# Altium PCB LPCB279R0.PcbDoc (part 1 of 3)
Units mm, origin at the board's own origin, x right, y up, seen from the top; angles counter-clockwise.
Board outline 96 x 109 mm, 2 copper layers (Top Layer, Bottom Layer); 115 components, 90 nets, 384 pads, 812 vias.
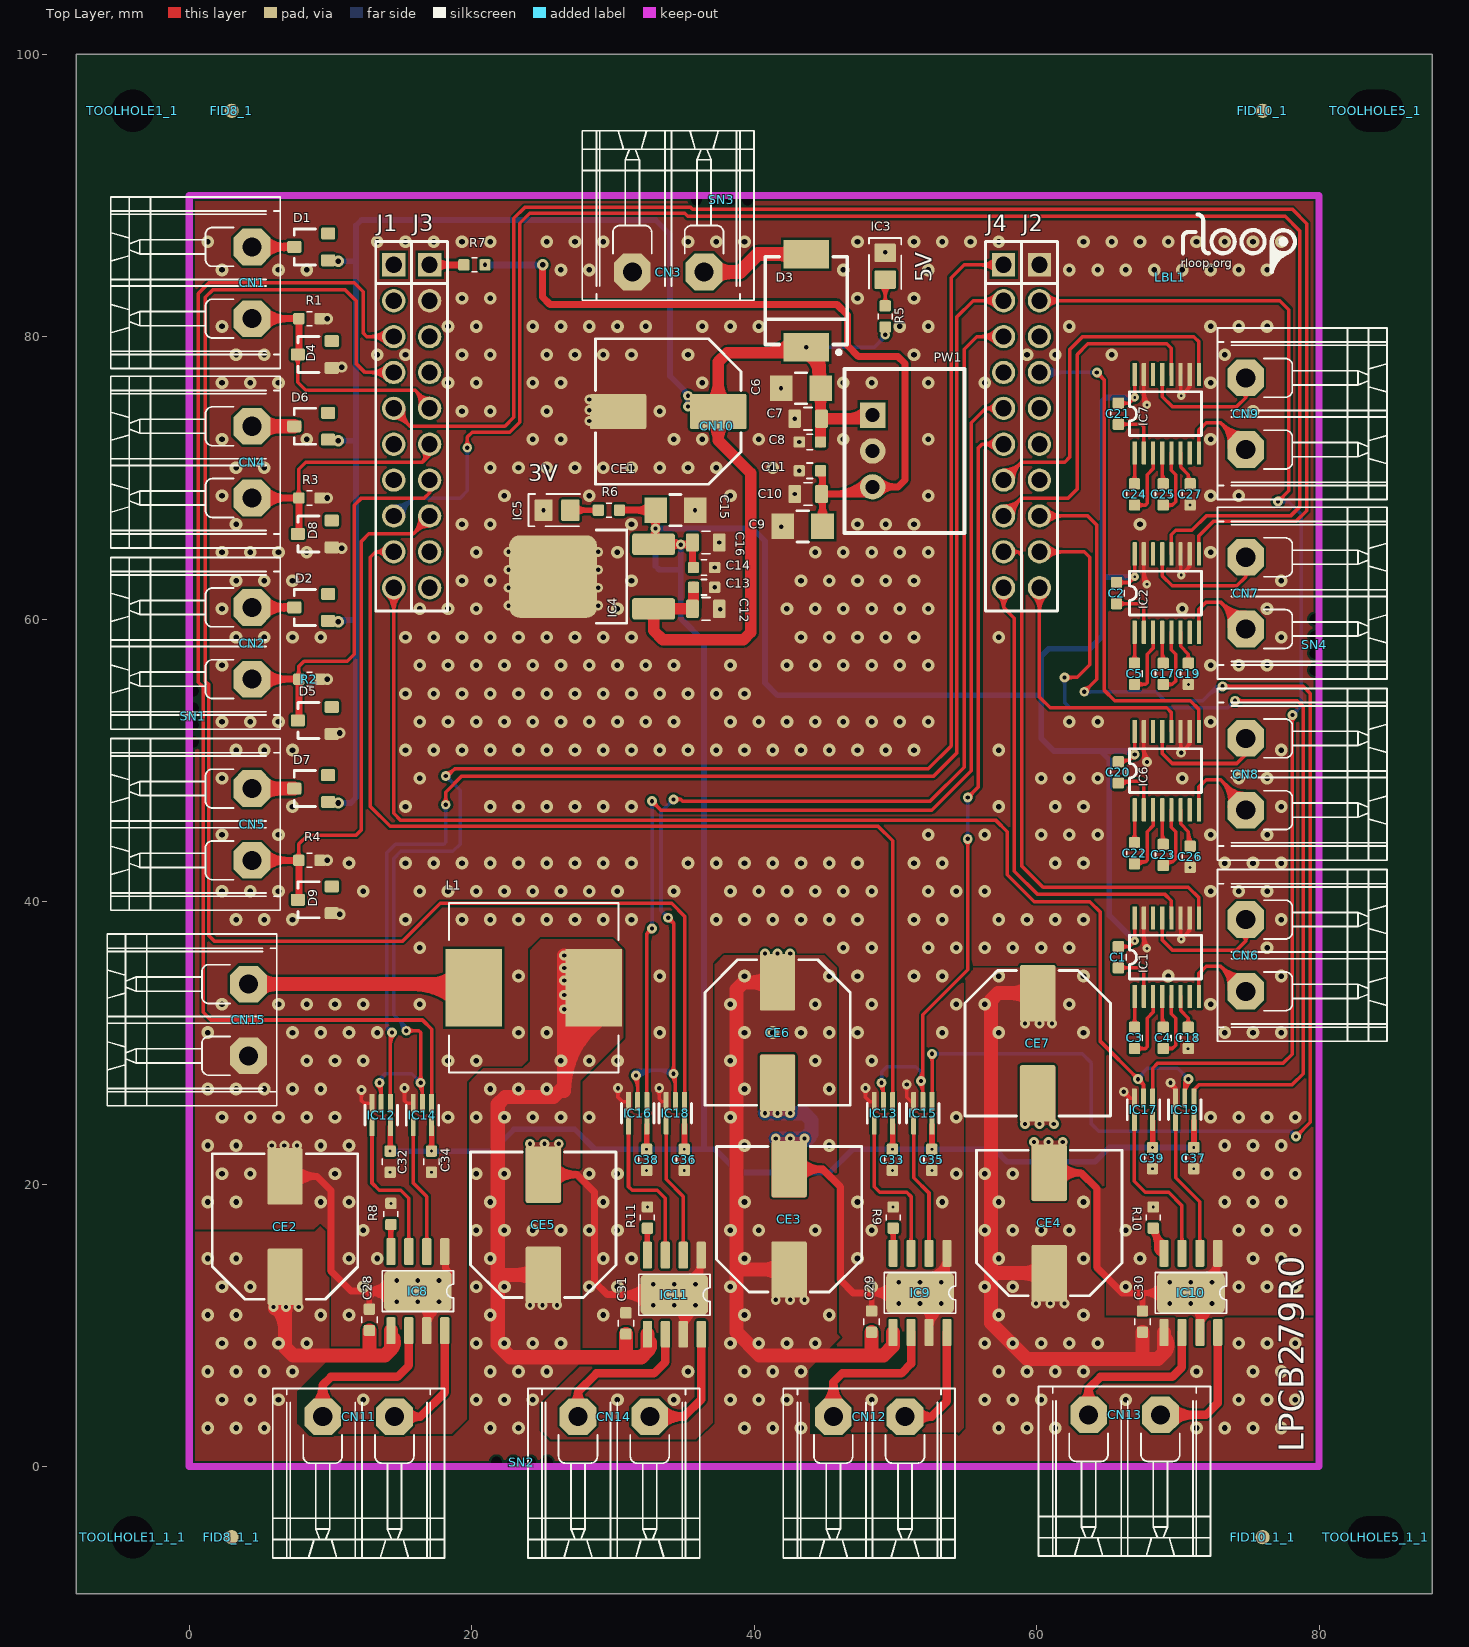
[diagram p0: Top Layer view]
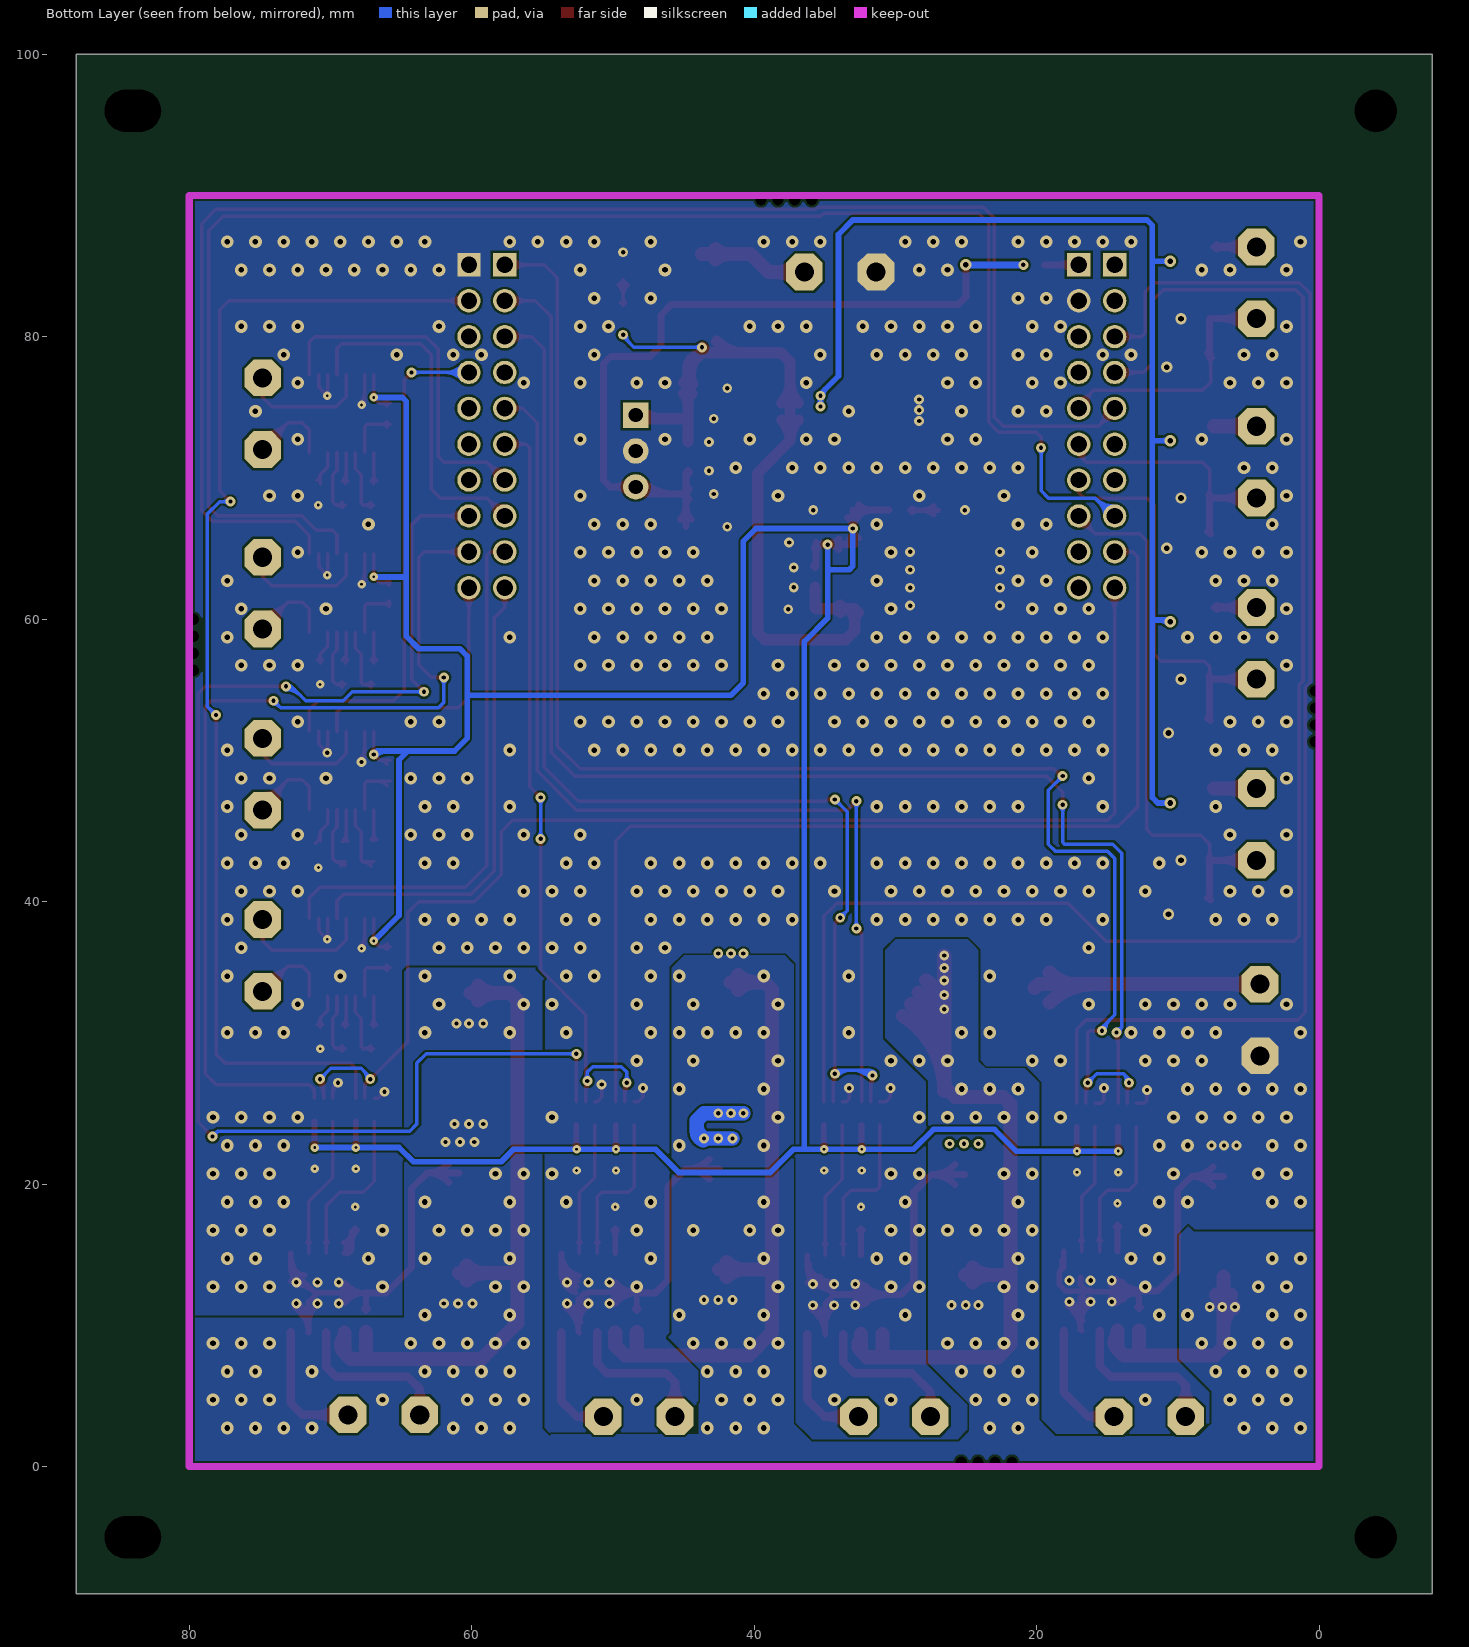
[diagram p1: Bottom Layer view, seen from below]

## Layer stack, top to bottom
Top Layer: signal copper 0.0356
Dielectric: dielectric 0.32, FR-4, Dk 4.8
Bottom Layer: signal copper 0.0356

## Board outline
-8,-9 -8,100 88,100 88,-9

## Design rules (kind name [scope] priority, off if disabled: settings)
Clearance [All] p1: gap=0.16
Height [All] p1 off: minheight=0 maxheight=25.4 prefheight=12.7
HoleSize [All] p1: absolutevalues=TRUE maxlimit=6 minlimit=0.025 maxpercent=80.000 minpercent=20.000
MinimumSolderMaskSliver [All] p1 off: minsoldermaskwidth=0.1
PlaneConnect PlaneConnect_1 [IsVia] p1: planeconnectstyle=Direct reliefexpansion=0.508 reliefentries=4 reliefconductorwidth=0.254 reliefairgap=0.254
PlaneConnect [All] p2: planeconnectstyle=Relief reliefexpansion=0.508 reliefentries=4 reliefconductorwidth=0.254 reliefairgap=0.254
PolygonConnect [IsVia] p1: connectstyle=Direct reliefconductorwidth=0.254 reliefentries=4 polygonreliefangle="90 Angle" airgapwidth=0.254
PolygonConnect PolygonConnect_1 [All] p2: connectstyle=Direct reliefconductorwidth=0.254 reliefentries=4 polygonreliefangle="90 Angle" airgapwidth=0.254
RoomDefinition "LPCB279 - TOP" [InComponentClass('LPCB279 - TOP')] p1: confinementstyle=ConfineIn formatcopy=TRUE lockcomponents=FALSE outline -154.685,-91.268 -103.885,-91.268 -103.885,-65.868 -154.685,-65.868
RoomDefinition "U_LPCB279 - POWER" [InComponentClass('U_LPCB279 - POWER')] p2: confinementstyle=ConfineIn formatcopy=TRUE lockcomponents=FALSE outline 169.038,80.563 204.979,80.563 204.979,130.855 169.038,130.855
RoomDefinition "U_LPCB279 - LIMIT SWITCHES" [InComponentClass('U_LPCB279 - LIMIT SWITCHES')] p3: confinementstyle=ConfineIn formatcopy=TRUE lockcomponents=FALSE outline 169.165,61.386 336.932,61.386 336.932,80.69 169.165,80.69
RoutingVias [All] p1: holewidth=0.6 width=1.2 viastyle="Through Hole" minholewidth=0.3 minwidth=0.6 maxholewidth=1 maxwidth=2
SilkToSilkClearance [All] p1 off: silktosilkclearance=0.1
SilkToSolderMaskClearance [IsPad] p1 off: minsilkscreentomaskgap=0.1 clearancetoexposedcopper=TRUE
SolderMaskExpansion [All] p1: expansion=0.102
Width [All] p1: maxlimit=1 minlimit=0.16 preferedwidth=0.2
22 further rules are at their usual default settings.

## Classes and differential pairs
component class "LPCB279 - TOP": LBL1 SN1 SN2 SN3 SN4
component class "U_LPCB279 - ANALOG INPUTS": CN1 CN2 CN4 CN5 D1 D2 D4 D5 D6 D7 D8 D9 R1 R2 R3 R4
component class "U_LPCB279 - POWER": C6 C7 C8 C9 C10 C11 C12 C13 C14 C15 C16 CE1 CN3 D3 IC3 IC4 IC5 PW1 R5 R6
component class "U_LPCB279 - HBRIDGE": C28 C29 C30 C31 CE2 CE3 CE4 CE5 CE6 CE7 CN11 CN12 CN13 CN14 CN15 IC8 IC9 IC10 IC11 L1 R8 R9 R10 R11
component class "U_LPCB279 - AND GATES": C32 C33 C34 C35 C36 C37 C38 C39 IC12 IC13 IC14 IC15 IC16 IC17 IC18 IC19
component class "U_LPCB279 - LIMIT SWITCHES": C1 C2 C3 C4 C5 C17 C18 C19 C20 C21 C22 C23 C24 C25 C26 C27 CN6 CN7 CN8 CN9 IC1 IC2 IC6 IC7
component class "U_LPCB279 - RM57 LAUNCH": CN10 R7

## Components (designator, comment, footprint, x,y, rotation, side; value= is the part's Value field where it differs from the comment)
C1 "100nF / 50V / 10% / SMD 0603" LFP011__CC1608-0603-IPC7351_B 65.786,36.068 r270 top
C2 "100nF / 50V / 10% / SMD 0603" LFP011__CC1608-0603-IPC7351_B 65.659,61.849 r270 top
C3 "100nF / 50V / 10% / SMD 0603" LFP011__CC1608-0603-IPC7351_B 66.929,30.353 r270 top
C4 "100nF / 50V / 10% / SMD 0603" LFP011__CC1608-0603-IPC7351_B 68.961,30.353 r270 top
C5 "100nF / 50V / 10% / SMD 0603" LFP011__CC1608-0603-IPC7351_B 66.929,56.134 r270 top
C6 "10uF / 50V / 10% / SMD 1206" LFP043__CC3216-1206 43.307,76.355 r180 top
C7 "1uF / 50V / 10% / SMD 0805" LFP010__CC2012-0805-IPC7351_B 43.815,74.196 r180 top
C8 "100nF / 50V / 10% / SMD 0603" LFP011__CC1608-0603-IPC7351_B 43.942,72.545 r180 top
C9 "10uF / 50V / 10% / SMD 1206" LFP043__CC3216-1206 43.434,66.576 r180 top
C10 "1uF / 50V / 10% / SMD 0805" LFP010__CC2012-0805-IPC7351_B 43.815,68.862 r180 top
C11 "100nF / 50V / 10% / SMD 0603" LFP011__CC1608-0603-IPC7351_B 43.942,70.513 r180 top
C12 "1uF / 50V / 10% / SMD 0805" LFP010__CC2012-0805-IPC7351_B 36.576,60.734 r0 top
C13 "100nF / 50V / 10% / SMD 0603" LFP011__CC1608-0603-IPC7351_B 36.449,62.258 r0 top
C14 "100nF / 50V / 10% / SMD 0603" LFP011__CC1608-0603-IPC7351_B 36.449,63.655 r0 top
C15 "10uF / 50V / 10% / SMD 1206" LFP043__CC3216-1206 34.417,67.719 r0 top
C16 "1uF / 50V / 10% / SMD 0805" LFP010__CC2012-0805-IPC7351_B 36.576,65.433 r0 top
C17 "100nF / 50V / 10% / SMD 0603" LFP011__CC1608-0603-IPC7351_B 68.961,56.134 r270 top
C18 "100nF / 50V / 10% / SMD 0603" LFP011__CC1608-0603-IPC7351_B 70.739,30.353 r270 top
C19 "100nF / 50V / 10% / SMD 0603" LFP011__CC1608-0603-IPC7351_B 70.739,56.134 r270 top
C20 "100nF / 50V / 10% / SMD 0603" LFP011__CC1608-0603-IPC7351_B 65.786,49.149 r270 top
C21 "100nF / 50V / 10% / SMD 0603" LFP011__CC1608-0603-IPC7351_B 65.786,74.549 r270 top
C22 "100nF / 50V / 10% / SMD 0603" LFP011__CC1608-0603-IPC7351_B 66.929,43.434 r270 top
C23 "100nF / 50V / 10% / SMD 0603" LFP011__CC1608-0603-IPC7351_B 68.961,43.307 r270 top
C24 "100nF / 50V / 10% / SMD 0603" LFP011__CC1608-0603-IPC7351_B 66.929,68.834 r270 top
C25 "100nF / 50V / 10% / SMD 0603" LFP011__CC1608-0603-IPC7351_B 68.961,68.834 r270 top
C26 "100nF / 50V / 10% / SMD 0603" LFP011__CC1608-0603-IPC7351_B 70.866,43.18 r270 top
C27 "100nF / 50V / 10% / SMD 0603" LFP011__CC1608-0603-IPC7351_B 70.866,68.834 r270 top
C28 "100nF / 50V / 10% / SMD 0603" LFP011__CC1608-0603-IPC7351_B 12.753,10.395 r90 top
C29 "100nF / 50V / 10% / SMD 0603" LFP011__CC1608-0603-IPC7351_B 48.313,10.268 r90 top
C30 "100nF / 50V / 10% / SMD 0603" LFP011__CC1608-0603-IPC7351_B 67.49,10.268 r90 top
C31 "100nF / 50V / 10% / SMD 0603" LFP011__CC1608-0603-IPC7351_B 30.914,10.141 r90 top
C32 "100nF / 50V / 10% / SMD 0603" LFP011__CC1608-0603-IPC7351_B 14.224,21.59 r270 top
C33 "100nF / 50V / 10% / SMD 0603" LFP011__CC1608-0603-IPC7351_B 49.784,21.717 r270 top
C34 "100nF / 50V / 10% / SMD 0603" LFP011__CC1608-0603-IPC7351_B 17.145,21.59 r270 top
C35 "100nF / 50V / 10% / SMD 0603" LFP011__CC1608-0603-IPC7351_B 52.578,21.717 r270 top
C36 "100nF / 50V / 10% / SMD 0603" LFP011__CC1608-0603-IPC7351_B 35.052,21.717 r270 top
C37 "100nF / 50V / 10% / SMD 0603" LFP011__CC1608-0603-IPC7351_B 71.12,21.844 r270 top
C38 "100nF / 50V / 10% / SMD 0603" LFP011__CC1608-0603-IPC7351_B 32.385,21.717 r270 top
C39 "100nF / 50V / 10% / SMD 0603" LFP011__CC1608-0603-IPC7351_B 68.199,21.844 r270 top
CE1 "330uF / 35V / 20% / SMD 10x10" LFP041__NICHICON_WT_10X10 33.909,74.704 r180 top
CE2 "330uF / 35V / 20% / SMD 10x10" LFP041__NICHICON_WT_10X10 6.784,16.999 r90 top
CE3 "330uF / 35V / 20% / SMD 10x10" LFP041__NICHICON_WT_10X10 42.471,17.507 r90 top
CE4 "330uF / 35V / 20% / SMD 10x10" LFP041__NICHICON_WT_10X10 60.886,17.253 r90 top
CE5 "330uF / 35V / 20% / SMD 10x10" LFP041__NICHICON_WT_10X10 25.072,17.126 r90 top
CE6 "330uF / 35V / 20% / SMD 10x10" LFP041__NICHICON_WT_10X10 41.656,30.734 r270 top
CE7 "330uF / 35V / 20% / SMD 10x10" LFP041__NICHICON_WT_10X10 60.071,29.972 r270 top
CN1 "691 313 510 002" "691 313 510 002" 4.445,86.36 r270 top
CN2 "691 313 510 002" "691 313 510 002" 4.445,60.833 r270 top
CN3 "691 313 510 002" "691 313 510 002" 36.449,84.582 r180 top
CN4 "691 313 510 002" "691 313 510 002" 4.445,73.66 r270 top
CN5 "691 313 510 002" "691 313 510 002" 4.445,48.006 r270 top
CN6 "691 313 510 002" "691 313 510 002" 74.803,33.655 r90 top locked
CN7 "691 313 510 002" "691 313 510 002" 74.803,59.309 r90 top locked
CN8 "691 313 510 002" "691 313 510 002" 74.803,46.482 r90 top locked
CN9 "691 313 510 002" "691 313 510 002" 74.803,72.009 r90 top locked
CN10 "RM57LAUNCHXL_BP_40P_1" RM57LAUNCHXL_BP_40P_1 14.478,85.09 r0 top locked
CN11 "691 313 510 002" "691 313 510 002" 9.451,3.537 r0 top
CN12 "691 313 510 002" "691 313 510 002" 45.604,3.537 r0 top
CN13 "691 313 510 002" "691 313 510 002" 63.68,3.664 r0 top
CN14 "691 313 510 002" "691 313 510 002" 27.527,3.537 r0 top
CN15 "691 313 510 002" "691 313 510 002" 4.191,34.163 r270 top locked
D1 "BAS16" LFP021__SOT23 8.636,86.36 r90 top
D2 "BAS16" LFP021__SOT23 8.636,60.833 r90 top
D3 "S3M-E3/57T" LFP040__DO-214AB 43.688,82.55 r90 top
D4 "MMBZ5226BLT1G" LFP021__SOT23 8.89,78.74 r90 top
D5 "MMBZ5226BLT1G" LFP021__SOT23 8.89,52.832 r90 top
D6 "BAS16" LFP021__SOT23 8.636,73.66 r90 top
D7 "BAS16" LFP021__SOT23 8.636,48.006 r90 top
D8 "MMBZ5226BLT1G" LFP021__SOT23 8.89,66.04 r90 top
D9 "MMBZ5226BLT1G" LFP021__SOT23 8.89,40.132 r90 top
FID8_1 "FIDUCIAL" LFP113__FIDUCIAL 3,96 r0 top
FID8_1_1 "FIDUCIAL" LFP113__FIDUCIAL 3,-5 r0 top
FID10_1 "FIDUCIAL" LFP113__FIDUCIAL 76,96 r0 top
FID10_1_1 "FIDUCIAL" LFP113__FIDUCIAL 76,-5 r0 top
IC1 "MAX3232CPWR" LFP049__TSSOP-16 69.215,36.068 r0 top
IC2 "MAX3232CPWR" LFP049__TSSOP-16 69.215,61.849 r0 top
IC3 "EL-17-21VGC/TR8" CR2012-0805-LED 49.276,84.991 r270 top
IC4 "NCV4274DT33RKG" LFP019__369A-13 28.321,63.02 r90 top
IC5 "EL-17-21VGC/TR8" CR2012-0805-LED 26.035,67.719 r0 top
IC6 "MAX3232CPWR" LFP049__TSSOP-16 69.215,49.276 r0 top
IC7 "MAX3232CPWR" LFP049__TSSOP-16 69.215,74.549 r0 top locked
IC8 "DRV8871DDARQ1" LFP158__DDA_R-PDSO-G8 16.182,12.427 r180 top
IC9 "DRV8871DDARQ1" LFP158__DDA_R-PDSO-G8 51.742,12.3 r180 top
IC10 "DRV8871DDARQ1" LFP158__DDA_R-PDSO-G8 70.919,12.3 r180 top
IC11 "DRV8871DDARQ1" LFP158__DDA_R-PDSO-G8 34.343,12.173 r180 top
IC12 "74LVC1G08GW,125" LFP047__SOT353 13.589,24.892 r180 top
IC13 "74LVC1G08GW,125" LFP047__SOT353 49.149,25.019 r180 top
IC14 "74LVC1G08GW,125" LFP047__SOT353 16.51,24.892 r180 top
IC15 "74LVC1G08GW,125" LFP047__SOT353 51.943,25.019 r180 top
IC16 "74LVC1G08GW,125" LFP047__SOT353 31.75,25.019 r180 top
IC17 "74LVC1G08GW,125" LFP047__SOT353 67.564,25.273 r180 top
IC18 "74LVC1G08GW,125" LFP047__SOT353 34.417,25.019 r180 top
IC19 "74LVC1G08GW,125" LFP047__SOT353 70.485,25.273 r180 top
L1 "MSS1278T-103MLB" LFP037__MSS1278T 24.384,33.909 r0 top
LBL1 "RLOOP_LOGO" RLOOP_LOGO 69.469,84.201 r0 top
PW1 "173010542" 173010542 48.387,71.91 r270 top
R1 "160R / 0.1W / 1% / SMD 0603" LFP020__CR1608-0603-IPC7351_B 8.509,81.28 r180 top
R2 "160R / 0.1W / 1% / SMD 0603" LFP020__CR1608-0603-IPC7351_B 8.509,55.753 r180 top
R3 "160R / 0.1W / 1% / SMD 0603" LFP020__CR1608-0603-IPC7351_B 8.509,68.58 r180 top
R4 "160R / 0.1W / 1% / SMD 0603" LFP020__CR1608-0603-IPC7351_B 8.509,42.926 r180 top
R5 "2.2K / 0.1W / 1% / SMD 0603" LFP020__CR1608-0603-IPC7351_B 49.276,81.435 r270 top
R6 "2.2K / 0.1W / 1% / SMD 0603" LFP020__CR1608-0603-IPC7351_B 29.718,67.719 r0 top
R7 "0R / 0.1W / SMD 0603" LFP020__CR1608-0603-IPC7351_B 20.193,85.09 r0 top
R8 "30K / 0.1W / 1% / SMD 0603" LFP020__CR1608-0603-IPC7351_B 14.277,17.888 r270 top
R9 "30K / 0.1W / 1% / SMD 0603" LFP020__CR1608-0603-IPC7351_B 49.837,17.634 r270 top
R10 "30K / 0.1W / 1% / SMD 0603" LFP020__CR1608-0603-IPC7351_B 68.252,17.634 r270 top
R11 "30K / 0.1W / 1% / SMD 0603" LFP020__CR1608-0603-IPC7351_B 32.438,17.634 r270 top
SN1 "PCB_SNAPOUT_0.3MM" PCB_SNAPOUT_0.3MM 0,53.114 r270 top
SN2 "PCB_SNAPOUT_0.3MM" PCB_SNAPOUT_0.3MM 23.548,0 r0 top
SN3 "PCB_SNAPOUT_0.3MM" PCB_SNAPOUT_0.3MM 37.719,90 r180 top
SN4 "PCB_SNAPOUT_0.3MM" PCB_SNAPOUT_0.3MM 80,58.194 r90 top
TOOLHOLE1_1 "Comment" TOOL-1#1 -4,96 r0 top
TOOLHOLE1_1_1 "Comment" TOOL-1#1 -4,-5 r0 top
TOOLHOLE5_1 "Comment" TOOL-1#2 84,96 r0 top
TOOLHOLE5_1_1 "Comment" TOOL-1#2 84,-5 r0 top

## Footprints (in the part's own frame and the unit in brackets; to place one, negate y for a bottom-side part, rotate by r counter-clockwise, add the part's x,y. Pads: shape width x height; smd on the part's side, far side on the other; paste and mask are expansions set on the pad)
"691 313 510 002" [mm] "Connector, Pluggable Terminal Block, 5.08mm, 2 Way, PTH"
  oct 2.6x2.6 hole 1.35: 1(0,0) 2(5.08,0)
  silkscreen extent -3.54,-10 8.62,2
173010542 [mm]
  rect 1.8x1.8 hole 1 paste-0.01: 1(-2.54,0)
  round 1.8 hole 1 paste-0.01: 2(0,0) 3(2.54,0)
  silkscreen extent -5.8,-2 5.8,6.5
CR2012-0805-LED [mm]
  rrect10% 1.3x1.5 smd paste-0.05: A(0.95,0) K(-0.95,0)
  silkscreen extent -2.01,-1.14 1.63,1.14
LFP010__CC2012-0805-IPC7351_B [mm]
  rrect25% 0.9x1.3 smd paste-0.01: 1(-0.95,0) 2(0.95,0)
  silkscreen extent -0.3,-0.8 0.3,0.8
LFP011__CC1608-0603-IPC7351_B [mm]
  rrect25% 0.8x0.8 smd: 1(-0.75,0) 2(0.75,0)
  silkscreen extent -0.2,-0.55 0.2,0.55
LFP019__369A-13 [mil]
  rrect25% 60x120 smd: 1(-90,-179.49) 3(90,-179.49)
  rrect25% 230x245 smd paste-196.85: 4(0,100.75)
  silkscreen extent -130,-104 130,-19
LFP020__CR1608-0603-IPC7351_B [mm]
  rrect25% 0.8x0.8 smd: 1(-0.75,0) 2(0.75,0)
  silkscreen extent -0.2,-0.5 0.2,0.5
LFP021__SOT23 [mm] "SOT-23; 3 Leads; Body 3.0 x 2.5 mm, inc. leads (LxW max)"
  rrect25% 0.85x1 smd paste-0.05: 1(-0.95,-1.2) 2(0.95,-1.2) 3(0,1.2)
  silkscreen extent -1.27,-0.3 1.28,1.2
LFP037__MSS1278T [mm]
  rect 4x5.5 smd: 1(-4.25,0) 2(4.25,0)
  silkscreen extent -6,-6 6,6
LFP040__DO-214AB [mm]
  rect 2.032x3.2 smd: 1(-3.3,0) 2(3.3,0)
  silkscreen extent -3.8,-2.9 3.1,2.9
LFP041__NICHICON_WT_10X10 [mm]
  rrect10% 4x2.5 smd paste-0.02: 1(-3.55,0) 2(3.55,0)
  silkscreen extent -5.15,-5.15 5.15,5.15
LFP043__CC3216-1206 [mm]
  rect 1.6x1.8 smd paste-0.01: 1(-1.4,0) 2(1.4,0)
  silkscreen extent -0.4,-1.1 0.4,1.1
LFP047__SOT353 [mm] "SOT-353/SC-88A; 5 Leads; Body 2.2 x 2.2 mm, inc. leads (LxW max)"
  rrect25% 0.35x1.35 smd paste-0.03: 1(-0.65,-0.825) 2(0,-0.825) 3(0.65,-0.825) 4(0.65,0.825) 5(-0.65,0.825)
  silkscreen extent -1.15,-0.7 1.15,0.7
LFP049__TSSOP-16 [mm] "Copied from 984E-02"
  rrect25% 0.3x1.65 smd paste-0.03: 1(-2.275,-2.775) 2(-1.625,-2.775) 3(-0.975,-2.775) 4(-0.325,-2.775) 5(0.325,-2.775) 6(0.975,-2.775) 7(1.625,-2.775) 8(2.275,-2.775) 9(2.275,2.775) 10(1.625,2.775) 11(0.975,2.775) 12(0.325,2.775) 13(-0.325,2.775) 14(-0.975,2.775) 15(-1.625,2.775) 16(-2.275,2.775)
  silkscreen extent -2.65,-1.55 2.45,1.55
LFP113__FIDUCIAL [mm]
  round 1 smd paste-2 mask+1.5: 0(0,0)
LFP158__DDA_R-PDSO-G8 [mm]
  rrect25% 0.65x1.9 smd paste-0.05: 1(-1.905,-2.8) 2(-0.635,-2.8) 3(0.635,-2.8) 4(1.905,-2.8) 5(1.905,2.8) 6(0.635,2.8) 7(-0.635,2.8) 8(-1.905,2.8)
  rrect25% 4.8x2.9 smd paste-5: PAD(0,0)
  silkscreen extent -2.52,-1.45 2.52,1.45
PCB_SNAPOUT_0.3MM [mm]
  round 0.4 hole 0.8 unplated: 0(-1.8,0.3) 0(-0.6,0.3) 0(0.6,0.3) 0(1.8,0.3)
RLOOP_LOGO [mm]
  silkscreen extent 0.89,0.39 8.82,4.45
RM57LAUNCHXL_BP_40P_1 [mm]
  rect 1.65x1.65 hole 1.15: J1_1(0,0) J2_1(45.72,0) J3_1(2.54,0) J4_1(43.18,0)
  round 1.65 hole 1.15: J1_2(0,-2.54) J1_3(0,-5.08) J1_4(0,-7.62) J1_5(0,-10.16) J1_6(0,-12.7) J1_7(0,-15.24) J1_8(0,-17.78) J1_9(0,-20.32) J1_10(0,-22.86) J2_2(45.72,-2.54) J2_3(45.72,-5.08) J2_4(45.72,-7.62) J2_5(45.72,-10.16) J2_6(45.72,-12.7) J2_7(45.72,-15.24) J2_8(45.72,-17.78) J2_9(45.72,-20.32) J2_10(45.72,-22.86) J3_2(2.54,-2.54) J3_3(2.54,-5.08) J3_4(2.54,-7.62) J3_5(2.54,-10.16) J3_6(2.54,-12.7) J3_7(2.54,-15.24) J3_8(2.54,-17.78) J3_9(2.54,-20.32) J3_10(2.54,-22.86) J4_2(43.18,-2.54) J4_3(43.18,-5.08) J4_4(43.18,-7.62) J4_5(43.18,-10.16) J4_6(43.18,-12.7) J4_7(43.18,-15.24) J4_8(43.18,-17.78) J4_9(43.18,-20.32) J4_10(43.18,-22.86)
  silkscreen extent -1.27,-24.51 46.99,1.65, body extent -1.27,-24.43 46.99,1.57, height 8.59
TOOL-1#1 [mm]
  round 2.54 hole 3 unplated: TOOL(0,0)
TOOL-1#2 [mm]
  round 0.076 hole 3 slot 4 at 0 deg unplated: TOOL1(0,0)

## Part data
C1 C2 C3 C4 C5 C8 C11 C13 C14 C17 C18 C19 C20 C21 C22 C23 C24 C25 C26 C27 C28 C29 C30 C31 C32 C33 C34 C35 C36 C37 C38 C39: "Capacitor, Ceramic Chip, 100nF (0.1uF), 50V, 5%, SMD 0603 [LCA016]"
C6 C9 C15: "Capacitor, Ceramic Chip, 10uF, 50V, X5R, 10%, SMD 1206 [LCA144]"
C7 C10 C12 C16: "Capacitor, Ceramic Chip, 1uF, 50V, SMD 0805 [LCA098]"
CE1 CE2 CE3 CE4 CE5 CE6 CE7: "Capacitor, Aluminum Electrolytic, 330uF, 35V, 20%, SMD (10mm x 10mm) [LCA071]"
CN1 CN2 CN3 CN4 CN5 CN6 CN7 CN8 CN9 CN11 CN12 CN13 CN14 CN15: "Connector, Pluggable Terminal Block, 5.08mm, 2 Way, PTH"
CN10: "Connector, RM57L843 LaunchXL, 40Pin Boosterpack Site1"
D1 D2 D6 D7: "Diode, Small Signal, 0.2A, 85V, SMD SOT-23 [LIC006]"
D3: "Diode, General Purpose Rectifier, 3A, 200V, SMD DO-214AB [LIC189]"
D4 D5 D8 D9: "Diode, Zener, 3.3V, 0.225W, SMD [LIC288]"
IC1 IC2 IC6 IC7: "IC, RS232 Line Driver, 3.3V, SMD TSSOP16 [LIC165]"
IC3 IC5: "LED, SMD, 0805 Green [LIC016]"
IC4: "IC, Voltage Regulator, 400mA, 3.3V LDO, SMD DPAK [LIC233]"
IC8 IC9 IC10 IC11: "IC, DC Motor Driver, 3.6A, SMD [LIC689]"
IC12 IC13 IC14 IC15 IC16 IC17 IC18 IC19: "IC, Logic AND Gate, Single 2 Input, SMD SOT353 [LIC239]"
L1: "Inductor, 10uH, 20%, 5.7A, SMD [LIN031]"
R1 R2 R3 R4: "Resistor, Ceramic Chip, 160R, 0.1W, 1%, SMD 0603 [LRE253]"
R5 R6: "Resistor, Ceramic Chip, 2.2K, 0.1W, 1%, SMD 0603 [LRE027]"
R7: "Resistor, Ceramic Chip, 0R, 0.1W, SMD 0603 [LRE026]"
R8 R9 R10 R11: "Resistor, Ceramic Chip, 30K, 0.1W, 1%, SMD 0603 [LRE120]"
SN1 SN2 SN3 SN4: "PCB Snapout + 0.3mm"

## Via types
v1: diameter 0.9, hole 0.4, Top Layer to Bottom Layer, tented both sides, 631 vias
v2: diameter 0.7, hole 0.3, Top Layer to Bottom Layer, tented both sides, 111 vias
v3: diameter 0.6, hole 0.2, Top Layer to Bottom Layer, tented both sides, 33 vias
v4: diameter 0.7, hole 0.33, Top Layer to Bottom Layer, tented bottom, 24 vias
v5: diameter 0.8, hole 0.4, Top Layer to Bottom Layer, tented both sides, 13 vias

## Nets (pads, with @x,y where several pads share a name; then routed paths per layer and width w, separated by ;. In a path a pad name is that pad's centre, name@x,y a point inside that pad or via, vN(x,y) a via of type N, cw(c..) or ccw(c..) an arc to the next point about the centre after c; other vN are vias at no path point)
BRIDGE_DIR_A1: CN10.J4_2 IC12.1 | length 105.6
  Top Layer w0.25: IC12.1@14.239,25.717 14.239,30.622 v2(14.351,30.734) ; 14.239,29.92 cw(c15.165,29.92) v2@14.51,30.575 ; v2@18.002,47.022 ccw(c17.618,47.406) 18.161,47.406 ccw(c18.704,47.406) v2@18.32,47.022 ; v2(18.161,46.863) 18.161,47.752 19.304,48.895 52.705,48.895 54.356,50.546 54.356,81.407 55.499,82.55 CN10.J4_2@57.658,82.55 ; CN10.J4_2@57.163,82.055 ccw(c55.968,80.86) 55.968,82.55 ccw(c55.968,84.24) CN10.J4_2@57.163,83.045 ; CN10.J4_2@57.34,82.232 ccw(c56.572,81.464) 56.572,82.55 ccw(c56.572,83.636) CN10.J4_2@57.34,82.868
  Bottom Layer w0.25: v2@14.126,30.735 ccw(c13.593,30.738) 13.97,31.115 ; v2@14.35,30.959 cw(c14.347,31.492) 13.97,31.115 ; v2(14.351,30.734) 13.97,31.115 ; v2@18.002,46.704 cw(c17.618,46.32) 18.161,46.32 cw(c18.704,46.32) v2@18.32,46.704 ; v2(18.161,46.863) 18.161,44.196 18.034,44.069 14.605,44.069 13.97,43.434 13.97,31.115
BRIDGE_DIR_A2: CN10.J4_5 IC16.1 | length 77.8
  Top Layer w0.25: IC16.1@32.4,25.844 32.4,37.734 ; v2@32.541,38.092 cw(c32.059,38.075) 32.4,37.734 ; v2@32.758,37.875 ccw(c32.741,37.393) 32.4,37.734 ; v2(32.766,38.1) 32.4,37.734 ; v2@32.766,46.892 cw(c32.766,46.349) 33.15,46.733 cw(c33.534,47.117) v2@32.991,47.117 ; v2(32.766,47.117) 33.401,46.482 52.578,46.482 55.372,49.276 55.372,73.914 56.388,74.93 ; CN10.J4_5@57.066,74.556 ccw(c56.388,74.128) 56.388,74.93 ; CN10.J4_5@57.066,75.304 cw(c56.388,75.732) 56.388,74.93 ; CN10.J4_5@57.658,74.93 56.388,74.93
  Bottom Layer w0.25: v2@32.607,38.259 ccw(c32.223,38.643) 32.766,38.643 ccw(c33.309,38.643) v2@32.925,38.259 ; v2@32.607,46.958 cw(c32.223,46.574) 32.766,46.574 cw(c33.309,46.574) v2@32.925,46.958 ; v2(32.766,38.1) v2(32.766,47.117)
BRIDGE_DIR_A3: CN10.J1_9 IC13.1 | length 77.5
  Top Layer w0.25: CN10.J1_9@13.886,64.396 ccw(c13.208,63.968) 13.208,64.77 ; CN10.J1_9@13.886,65.144 cw(c13.208,65.572) 13.208,64.77 ; CN10.J1_9@14.478,64.77 13.208,64.77 ; IC13.1@49.799,25.844 49.799,44.308 48.768,45.339 14.224,45.339 12.827,46.736 12.827,64.389 13.208,64.77
BRIDGE_DIR_A4: CN10.J2_2 IC17.1 | length 92.8
  Top Layer w0.25: CN10.J2_2@60.198,82.55 77.216,82.55 77.851,81.915 77.851,69.088 v2(77.089,68.326) ; CN10.J2_2@60.516,82.232 cw(c61.284,81.464) 61.284,82.55 cw(c61.284,83.636) CN10.J2_2@60.516,82.868 ; CN10.J2_2@60.693,82.055 cw(c61.888,80.86) 61.888,82.55 cw(c61.888,84.24) CN10.J2_2@60.693,83.045 ; IC17.1@68.214,26.098 68.214,28.209 68.58,28.575 77.47,28.575 78.105,29.21 ; v2@77.089,68.551 ccw(c77.089,69.094) 77.473,68.71 ccw(c77.857,68.326) v2@77.314,68.326 ; v2@77.946,53.054 cw(c77.562,52.67) 78.105,52.67 cw(c78.648,52.67) v2@78.264,53.054 ; 78.105,29.464 78.105,29.21 ; v2(78.105,53.213) 78.105,29.21
  Bottom Layer w0.25: v2(77.089,68.326) 77.851,68.326 78.74,67.437 78.74,53.848 v2(78.105,53.213) ; v2@77.248,68.167 cw(c77.632,67.783) 77.632,68.326 cw(c77.632,68.869) v2@77.248,68.485 ; v2@78.105,53.438 ccw(c78.105,53.981) 78.489,53.597 ccw(c78.873,53.213) v2@78.33,53.213
BRIDGE_DIR_B1: CN10.J1_3 IC14.1 | length 94.8
  Top Layer w0.25: CN10.J1_3@13.983,79.515 ccw(c12.788,78.32) 12.788,80.01 ccw(c12.788,81.7) CN10.J1_3@13.983,80.505 ; CN10.J1_3@14.16,79.692 ccw(c13.392,78.924) 13.392,80.01 ccw(c13.392,81.096) CN10.J1_3@14.16,80.328 ; CN10.J1_3@14.478,80.01 12.573,80.01 12.319,80.264 12.319,83.185 11.684,83.82 1.397,83.82 0.635,83.058 0.635,55.548 0.985,55.198 0.985,32.162 1.524,31.623 16.51,31.623 17.16,30.973 IC14.1@17.16,25.717
BRIDGE_DIR_B2: CN10.J1_4 IC18.1 | length 116.7
  Top Layer w0.25: CN10.J1_4@13.983,76.975 ccw(c12.788,75.78) 12.788,77.47 ccw(c12.788,79.16) CN10.J1_4@13.983,77.965 ; CN10.J1_4@14.16,77.152 ccw(c13.392,76.384) 13.392,77.47 ccw(c13.392,78.556) CN10.J1_4@14.16,77.788 ; CN10.J1_4@14.478,77.47 12.446,77.47 11.811,78.105 11.811,82.55 11.049,83.312 1.651,83.312 1.143,82.804 1.143,55.62 1.395,55.368 1.395,37.594 1.778,37.211 15.113,37.211 17.78,39.878 34.163,39.878 35.067,38.974 IC18.1@35.067,25.844
BRIDGE_DIR_B3: CN10.J2_8 IC15.1 | length 111.9
  Top Layer w0.25: v2@52.434,29.066 cw(c52.05,28.682) 52.593,28.682 cw(c53.136,28.682) v2@52.752,29.066 ; IC15.1@52.593,25.844 v2(52.593,29.225) ; CN10.J2_8@60.198,67.31 63.627,67.31 64.262,66.675 64.262,55.753 v2(63.373,54.864) ; CN10.J2_8@60.516,66.992 cw(c61.284,66.224) 61.284,67.31 cw(c61.284,68.396) CN10.J2_8@60.516,67.628 ; CN10.J2_8@60.693,66.815 cw(c61.888,65.62) 61.888,67.31 cw(c61.888,69) CN10.J2_8@60.693,67.805 ; v2@63.373,55.089 ccw(c63.373,55.632) 63.757,55.248 ccw(c64.141,54.864) v2@63.598,54.864 ; v2(73.152,55.245) 78.867,55.245 79.375,54.737 79.375,24.384 v2(78.359,23.368) ; v2@73.311,55.086 cw(c73.695,54.702) 73.695,55.245 cw(c73.695,55.788) v2@73.311,55.404 ; v2@78.359,23.593 ccw(c78.359,24.136) 78.743,23.752 ccw(c79.127,23.368) v2@78.584,23.368
  Bottom Layer w0.25: v2(52.593,29.225) 63.231,29.225 63.881,28.575 63.881,24.257 64.389,23.749 77.978,23.749 ; v2@52.752,29.066 cw(c53.136,28.682) 53.136,29.225 cw(c53.136,29.768) v2@52.752,29.384 ; v2(63.373,54.864) 68.453,54.864 69.088,54.229 71.755,54.229 72.771,55.245 ; v2@63.532,54.705 cw(c63.916,54.321) 63.916,54.864 cw(c63.916,55.407) v2@63.532,55.023 ; 72.117,54.591 cw(c73.152,53.557) v2@73.152,55.02 ; 72.544,55.018 cw(c73.152,54.411) v2@73.152,55.27 ; v2@72.955,55.136 ccw(c72.771,55.035) 72.771,55.245 ; v2@72.955,55.354 cw(c72.771,55.455) 72.771,55.245 ; v2(73.152,55.245) 72.771,55.245 ; v2@78.134,23.369 ccw(c77.601,23.372) 77.978,23.749 ; v2@78.358,23.593 cw(c78.355,24.126) 77.978,23.749 ; v2(78.359,23.368) 77.978,23.749
BRIDGE_DIR_B4: CN10.J2_9 IC19.1 | length 75.5
  Top Layer w0.25: CN10.J2_9@60.198,64.77 63.373,64.77 63.754,64.389 63.754,56.769 62.865,55.88 v2(61.976,55.88) ; CN10.J2_9@60.516,64.452 cw(c61.284,63.684) 61.284,64.77 cw(c61.284,65.856) CN10.J2_9@60.516,65.088 ; CN10.J2_9@60.693,64.275 cw(c61.888,63.08) 61.888,64.77 cw(c61.888,66.46) CN10.J2_9@60.693,65.265 ; v2@62.135,55.721 cw(c62.519,55.337) 62.519,55.88 cw(c62.519,56.423) v2@62.135,56.039 ; IC19.1@71.135,26.098 71.135,26.685 71.501,27.051 78.105,27.051 78.867,27.813 78.867,53.819 78.457,54.229 v2(74.041,54.229) ; IC19.1@71.185,26.598 cw(c71.516,26.598) 71.282,26.832 ; v2@74.2,54.07 cw(c74.584,53.686) 74.584,54.229 cw(c74.584,54.772) v2@74.2,54.388
  Bottom Layer w0.25: v2@61.817,55.721 cw(c61.433,55.337) 61.976,55.337 cw(c62.519,55.337) v2@62.135,55.721 ; v2(61.976,55.88) 61.976,54.102 62.357,53.721 73.533,53.721 v2(74.041,54.229) ; v2@73.816,54.229 cw(c73.273,54.229) 73.657,53.845 cw(c74.041,53.461) v2@74.041,54.004
BRIDGE_PWM_1: CN10.J4_1 IC12.2 IC14.2 | length 120
  Top Layer w0.25: v2@13.303,27.019 cw(c12.612,26.328) IC12.2@13.589,26.328 ; v2(13.462,27.178) 13.589,27.051 IC12.2@13.589,25.717 ; v2(15.367,30.861) 16.256,30.861 16.383,30.734 v2(16.383,27.178) 16.51,27.051 IC14.2@16.51,25.717 ; v2@15.526,30.702 cw(c15.91,30.318) 15.91,30.861 cw(c15.91,31.404) v2@15.526,31.02 ; v2@16.224,27.019 cw(c15.533,26.328) IC14.2@16.51,26.328 ; v2@16.224,27.337 ccw(c15.84,27.721) 16.383,27.721 ccw(c16.926,27.721) v2@16.542,27.337 ; v2(18.161,48.895) 18.288,48.895 18.796,49.403 52.324,49.403 53.946,51.025 53.946,84.172 54.864,85.09 CN10.J4_1@57.658,85.09 ; v2@18.161,49.12 ccw(c18.161,49.97) 18.762,49.369 ; CN10.J4_1@57.163,84.595 ccw(c55.968,83.4) 55.968,85.09 ccw(c55.968,86.78) CN10.J4_1@57.163,85.585 ; CN10.J4_1@57.34,84.772 ccw(c56.572,84.004) 56.572,85.09 ccw(c56.572,86.176) CN10.J4_1@57.34,85.408
  Bottom Layer w0.25: v2(13.462,27.178) 13.462,27.432 13.843,27.813 ; v2@13.681,27.232 cw(c14.278,27.378) 13.843,27.813 ; 14.803,31.679 cw(c13.986,30.861) v2@15.142,30.861 ; 15.23,31.252 cw(c14.839,30.861) v2@15.392,30.861 ; v2(15.367,30.861) 15.367,31.115 14.478,32.004 14.478,43.053 14.986,43.561 18.669,43.561 19.177,44.069 19.177,47.879 v2(18.161,48.895) ; v2@16.158,27.178 ccw(c15.615,27.178) 15.999,27.562 ccw(c16.383,27.946) v2@16.383,27.403 ; v2(16.383,27.178) 15.748,27.813 13.843,27.813 ; v2@18.161,48.67 cw(c18.161,48.127) 18.545,48.511 cw(c18.929,48.895) v2@18.386,48.895
BRIDGE_PWM_2: CN10.J4_3 IC16.2 IC18.2 | length 96.5
  Top Layer w0.25: v2@31.464,27.527 cw(c30.773,26.836) 31.75,26.836 ; v2(31.623,27.686) 31.75,27.559 IC16.2@31.75,25.844 ; v2(33.909,38.862) 34.29,38.481 ; v2@33.91,38.637 cw(c33.913,38.104) 34.29,38.481 ; v2@34.131,27.654 cw(c33.44,26.963) 34.417,26.963 ; v2@34.131,27.972 ccw(c33.747,28.356) 34.29,28.356 ccw(c34.833,28.356) v2@34.449,27.972 ; v2@34.134,38.861 ccw(c34.667,38.858) 34.29,38.481 ; v2(34.29,47.244) 34.798,47.244 ; IC18.2@34.417,25.844 34.417,27.686 v2(34.29,27.813) 34.29,38.481 ; v2@34.457,47.093 cw(c34.798,46.783) 34.798,47.244 ; v2@34.457,47.395 ccw(c34.798,47.705) 34.798,47.244 ; CN10.J4_3@57.163,79.515 ccw(c55.968,78.32) 55.968,80.01 ccw(c55.968,81.7) CN10.J4_3@57.163,80.505 ; CN10.J4_3@57.34,79.692 ccw(c56.572,78.924) 56.572,80.01 ccw(c56.572,81.096) CN10.J4_3@57.34,80.328 ; CN10.J4_3@57.658,80.01 55.753,80.01 54.864,79.121 54.864,49.53 52.451,47.117 34.925,47.117 34.798,47.244
  Bottom Layer w0.25: v2@31.429,27.88 cw(c31.879,27.43) 31.879,28.067 ; v2@31.605,27.704 cw(c32.482,26.827) 32.482,28.067 ; v2(31.623,27.686) 31.623,27.813 31.877,28.067 ; v2@31.782,27.527 cw(c33.086,26.223) 33.086,28.067 ; v2@31.827,27.781 cw(c32.056,27.888) 31.877,28.067 ; 33.134,28.067 cw(c33.134,26.657) v2@34.131,27.654 ; v2@33.684,38.862 ccw(c33.141,38.862) 33.525,39.246 ccw(c33.909,39.63) v2@33.909,39.087 ; 33.737,28.067 cw(c33.737,27.26) v2@34.308,27.831 ; v2(33.909,38.862) 33.401,39.37 33.401,46.355 v2(34.29,47.244) ; v2@34.065,47.244 cw(c33.522,47.244) 33.906,46.86 cw(c34.29,46.476) v2@34.29,47.019 ; v2(34.29,27.813) 34.036,28.067 31.877,28.067
BRIDGE_PWM_3: CN10.J4_6 IC13.2 IC15.2 | length 66.8
  Top Layer w0.25: v2@48.863,27.019 cw(c48.172,26.328) IC13.2@49.149,26.328 ; v2(49.022,27.178) 49.149,27.051 IC13.2@49.149,25.844 ; v2@51.657,27.146 cw(c50.966,26.455) IC15.2@51.943,26.455 ; v2@51.657,27.464 ccw(c50.966,28.155) 51.943,28.155 ; IC15.2@51.943,25.844 51.943,32.004 55.118,35.179 v2(55.118,44.45) ; v2@54.959,44.291 cw(c54.575,43.907) 55.118,43.907 cw(c55.661,43.907) v2@55.277,44.291 ; v2(55.118,47.371) 55.88,48.133 55.88,72.136 56.134,72.39 ; v2@55.118,47.596 ccw(c55.118,48.139) 55.502,47.755 ccw(c55.886,47.371) v2@55.343,47.371 ; CN10.J4_6@57.127,71.934 ccw(c56.134,71.081) 56.134,72.39 ; CN10.J4_6@57.127,72.846 cw(c56.134,73.699) 56.134,72.39 ; CN10.J4_6@57.317,72.097 ccw(c56.678,71.549) 56.678,72.39 ccw(c56.678,73.231) CN10.J4_6@57.317,72.683 ; CN10.J4_6@57.658,72.39 56.134,72.39
  Bottom Layer w0.25: v2@48.863,27.337 ccw(c48.479,27.721) 49.022,27.721 ccw(c49.565,27.721) v2@49.181,27.337 ; v2(49.022,27.178) 49.022,27.94 49.403,28.321 51.435,28.321 51.816,27.94 v2(51.816,27.305) ; v2@51.657,27.464 ccw(c51.273,27.848) 51.816,27.848 ccw(c52.359,27.848) v2@51.975,27.464 ; v2@54.959,44.609 ccw(c54.575,44.993) 55.118,44.993 ccw(c55.661,44.993) v2@55.277,44.609 ; v2@54.959,47.212 cw(c54.575,46.828) 55.118,46.828 cw(c55.661,46.828) v2@55.277,47.212 ; v2(55.118,44.45) v2(55.118,47.371)
BRIDGE_PWM_4: CN10.J1_10 IC17.2 IC19.2 | length 100.5
  Top Layer w0.25: CN10.J1_10@13.983,61.735 cw(c12.788,60.54) 14.478,60.54 cw(c16.168,60.54) CN10.J1_10@14.973,61.735 ; CN10.J1_10@14.16,61.912 cw(c13.392,61.144) 14.478,61.144 cw(c15.564,61.144) CN10.J1_10@14.796,61.912 ; CN10.J1_10@14.478,62.23 14.478,46.257 14.986,45.749 57.121,45.749 57.912,44.958 57.912,41.91 59.817,40.005 63.754,40.005 64.516,39.243 64.516,30.099 v2(67.183,27.432) 67.564,27.051 ; v2@66.958,27.432 ccw(c66.415,27.432) 66.799,27.816 ccw(c67.183,28.2) v2@67.183,27.657 ; v2@67.184,27.207 cw(c67.187,26.674) 67.564,27.051 ; v2@67.408,27.431 ccw(c67.941,27.428) 67.564,27.051 ; IC17.2@67.564,26.098 67.564,27.051 ; IC19.2@70.485,26.098 70.485,27.178 ; IC19.2@70.485,26.276 cw(c71.895,26.276) v2@70.898,27.273 ; 70.485,26.879 cw(c71.292,26.879) v2@70.721,27.45 ; v2@70.526,27.358 cw(c70.362,27.301) 70.485,27.178 ; v2@70.665,27.219 ccw(c70.608,27.055) 70.485,27.178 ; v2(70.739,27.432) 70.485,27.178
  Bottom Layer w0.25: v2(67.183,27.432) 67.183,27.559 67.818,28.194 69.977,28.194 v2(70.739,27.432) ; v2@67.408,27.432 cw(c68.258,27.432) 67.657,28.033 ; v2@70.514,27.432 ccw(c69.971,27.432) 70.355,27.816 ccw(c70.739,28.2) v2@70.739,27.657
D3V3: C1.1 C2.1 C14.1 C15.1 C16.1 C20.1 C21.1 C32.1 C33.1 C34.1 C35.1 C36.1 C37.1 C38.1 C39.1 IC1.16 IC2.16 IC4.3 IC6.16 IC7.16 IC12.5 IC13.5 IC14.5 IC15.5 IC16.5 IC17.5 IC18.5 IC19.5 R6.2 | length 263.7
  Top Layer w0.25: C1.1@65.786,36.818 66.536,36.818 v3(66.94,37.222) IC1.16@66.94,38.843 ; C20.1@65.786,50.026 66.536,50.026 ; C2.1@65.786,62.599 66.536,62.599 v3(66.94,63.003) IC2.16@66.94,64.624 ; C21.1@65.786,75.299 66.536,75.299 v3(66.94,75.703) IC7.16@66.94,77.324 ; C2.1@65.853,62.405 cw(c66.323,61.935) 66.323,62.599 cw(c66.323,63.263) C2.1@65.853,62.793 ; C1.1@65.98,36.624 cw(c66.45,36.154) 66.45,36.818 cw(c66.45,37.482) C1.1@65.98,37.012 ; C21.1@65.98,75.105 cw(c66.45,74.635) 66.45,75.299 cw(c66.45,75.963) C21.1@65.98,75.493 ; C20.1@66.015,49.747 cw(c66.536,49.4) 66.536,50.026 ; v2@66.715,50.43 cw(c66.172,50.43) 66.556,50.046 cw(c66.94,49.662) v2@66.94,50.205 ; v3@66.765,37.222 cw(c66.343,37.222) 66.641,36.923 cw(c66.94,36.625) v3@66.94,37.047 ; v3@66.765,63.003 cw(c66.343,63.003) 66.641,62.704 cw(c66.94,62.406) v3@66.94,62.828 ; v3@66.765,75.703 cw(c66.343,75.703) 66.641,75.404 cw(c66.94,75.106) v3@66.94,75.528 ; v2@66.781,50.589 ccw(c66.397,50.973) 66.94,50.973 ccw(c67.483,50.973) v2@67.099,50.589 ; v3@66.816,37.346 ccw(c66.518,37.644) 66.94,37.644 ccw(c67.362,37.644) v3@67.064,37.346 ; v3@66.816,63.127 ccw(c66.518,63.425) 66.94,63.425 ccw(c67.362,63.425) v3@67.064,63.127 ; v3@66.816,75.827 ccw(c66.518,76.125) 66.94,76.125 ccw(c67.362,76.125) v3@67.064,75.827 ; IC6.16@66.94,52.051 v2(66.94,50.43) 66.536,50.026
  Top Layer w0.4: C32.1@14.083,22.481 ccw(c13.705,22.859) 14.239,22.859 ; v3(14.224,22.34) 14.239,22.355 IC12.5@14.239,24.067 ; 14.239,22.787 ccw(c14.671,22.787) C32.1@14.365,22.481 ; C34.1@17.004,22.481 ccw(c16.626,22.859) 17.16,22.859 ; v3(17.145,22.34) 17.16,22.355 IC14.5@17.16,24.067 ; 17.16,22.787 ccw(c17.592,22.787) C34.1@17.286,22.481 ; C38.1@32.244,22.608 ccw(c31.866,22.986) 32.4,22.986 ; v3(32.385,22.467) 32.4,22.482 IC16.5@32.4,24.194 ; 32.4,22.914 ccw(c32.832,22.914) C38.1@32.526,22.608 ; C36.1@34.911,22.608 ccw(c34.533,22.986) 35.067,22.986 ; C36.1@35.067,22.482 IC18.5@35.067,24.194 ; 35.067,22.914 ccw(c35.499,22.914) C36.1@35.193,22.608 ; C33.1@49.643,22.608 ccw(c49.265,22.986) 49.799,22.986 ; v3(49.784,22.467) 49.799,22.482 IC13.5@49.799,24.194 ; 49.799,22.914 ccw(c50.231,22.914) C33.1@49.925,22.608 ; C35.1@52.437,22.608 ccw(c52.059,22.986) 52.593,22.986 ; v3(52.578,22.467) 52.593,22.482 IC15.5@52.593,24.194 ; 52.593,22.914 ccw(c53.025,22.914) C35.1@52.719,22.608 ; C39.1@68.058,22.735 ccw(c67.68,23.113) 68.214,23.113 ; v3(68.199,22.594) 68.214,22.609 IC17.5@68.214,24.448 ; 68.214,23.041 ccw(c68.646,23.041) C39.1@68.34,22.735 ; C37.1@70.979,22.735 ccw(c70.601,23.113) 71.135,23.113 ; v3(71.12,22.594) 71.135,22.609 IC19.5@71.135,24.448 ; 71.135,23.041 ccw(c71.567,23.041) C37.1@71.261,22.735
  Top Layer w0.5: R6.2@30.468,67.719 C15.1@33.017,67.719 v2(33.017,66.421) ; IC4.3@32.627,65.751 ccw(c32.247,66.421) v2(33.017,66.421) ; C15.1@32.628,67.33 ccw(c31.689,66.391) 31.689,67.719 ccw(c31.689,69.047) C15.1@32.628,68.108 ; C15.1@32.659,67.202 cw(c31.987,66.421) v2(33.017,66.421) ; v2@33.017,66.211 ccw(c33.785,66.211) IC4.3@33.242,65.668 ; IC4.3@33.061,66.047 cw(c33.473,66.158) v2@33.104,66.371 ; C15.1@33.375,67.202 ccw(c34.047,66.421) v2(33.017,66.421) ; IC4.3@34.004,64.944 cw(c34.878,64.07) 34.878,65.306 cw(c34.878,66.542) IC4.3@34.004,65.668 ; 34.466,65.416 cw(c34.361,65.026) v2@34.711,65.228 ; v2@34.848,65.191 cw(c35.09,64.773) C16.1@35.215,65.24 ; v2@34.967,65.306 cw(c34.967,64.574) 35.485,65.092 cw(c35.143,64.75) 35.626,64.75 cw(c36.109,64.75) C16.1@35.767,65.092 ; 35.626,64.193 ccw(c36.237,64.193) C14.1@35.805,63.761 ; C14.1@35.699,63.655 35.626,63.728 C16.1@35.626,65.433 35.499,65.306 IC4.3@32.88,65.306 33.017,65.443 v2(33.017,66.421)
  Bottom Layer w0.4: v3(14.224,22.34) v3(17.145,22.34) 21.451,22.34 22.987,23.876 27.305,23.876 28.714,22.467 v3(32.385,22.467) v3(35.052,22.467) 36.449,22.467 ; v2@32.911,66.315 cw(c32.655,66.059) 33.017,66.059 cw(c33.379,66.059) 33.123,66.315 cw(c33.379,66.059) 33.379,66.421 cw(c33.379,66.783) v2@33.123,66.527 ; v2@34.692,65.172 cw(c34.436,64.916) 34.798,64.916 cw(c35.16,64.916) v2@34.904,65.172 ; v2(34.798,65.278) 34.798,63.5 ; 65.991,50.673 cw(c65.991,49.481) v2@66.834,50.324 ; v3(66.94,37.222) 65.151,39.011 65.151,50.038 64.516,50.673 ; v2(66.94,50.43) 66.697,50.673 64.516,50.673 ; v3(66.94,63.003) 66.929,62.992 64.643,62.992 ; v3(66.94,75.703) 64.908,75.703 64.643,75.438 64.643,62.992 ; v3(71.12,22.594) v3(68.199,22.594) 65.139,22.594 64.135,21.59 57.912,21.59 57.035,22.467 v3(52.578,22.467) v3(49.784,22.467) 46.978,22.467 45.339,20.828 38.862,20.828 37.223,22.467 36.449,22.467 ; 34.798,63.5 33.274,63.5 33.017,63.757 v2(33.017,66.421) 39.878,66.421 40.767,65.532 40.767,55.499 41.656,54.61 60.198,54.61 60.325,54.483 ; 34.798,63.5 34.798,60.071 36.449,58.42 36.449,22.467 ; 60.325,54.483 60.325,51.562 61.214,50.673 64.516,50.673 ; 60.325,54.483 60.325,57.404 60.833,57.912 63.754,57.912 64.643,58.801 64.643,62.992